# Allegro board AC_CON.brd
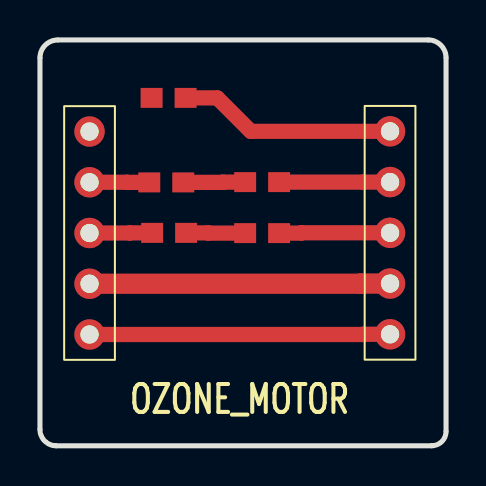
[diagram p0: board, top side]
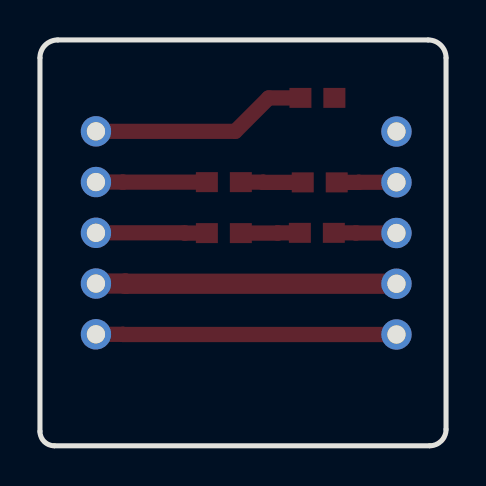
[diagram p1: board, bottom side, seen from below]

Outline 20.33 x 20.33 mm; copper layers: TOP, BOTTOM. Coordinates in mm from the lower left corner of the outline.
Outline path: 0,19.43 arc(0.26,20.07) 0.9,20.33 19.44,20.33 arc(20.07,20.07) 20.33,19.44 20.33,0.73 arc(20.12,0.22) 19.61,0.01 0.82,0.01 arc(0.24,0.25) 0,0.83 0,19.43 ; 0,19.56 arc(0.23,20.1) 0.77,20.32 19.56,20.32 arc(20.1,20.1) 20.32,19.56 20.32,0.76 arc(20.1,0.22) 19.56,0 0.77,0 arc(0.23,0.22) 0,0.76 0,19.56

## Placement (name value [footprint] x y rotation side)
J1  ACC2  [JUMPER5]  17.52 5.59 90 top
J2  ACC4  [JUMPER5]  2.48 5.58 90 top
R1  0R  [0603]  11.12 13.21 180 top
R2  0R  [0603]  11.12 10.66 180 top
R3  0R  [0603]  6.32 13.2 0 top
R4  0R  [0603]  6.47 10.67 0 top
R5  0R  [0603]  6.44 17.43 180 top

## Library data of the parts
J1 = CON5_0
J2 = CON5_1
R1-R5 = R

## Footprints (pads in the part's own frame, mm; a bottom-side part is the same pattern mirrored in y, then rotated)
0603
  rect 1.1x1 smd: 1(-0.85,0) 2(0.85,0)
JUMPER5
  round 1.524 hole 0.914: 1(0,0) 2(2.54,0) 3(5.08,0) 4(7.62,0) 5(10.16,0)

## Nets
3V3: J1.1 J2.1
GND: J1.2 J2.2
D1: R5.2
SCL: R1.2 R3.2
SDA: R2.2 R4.2
N64492: J2.4 R3.1
N64506: J2.3 R4.1
N64576: J1.3 R2.1
N64602: J1.4 R1.1
N64946: J1.5 R5.1

Pads without a net: J2 5

## Routing (per net, layer and track width the routed paths; a pad name or vN(x,y) marks a point on that pad's centre or on a via; arc(x,y) is an arc through that point)
3V3: length 15.1
  TOP w0.762: J1.1 16.18,5.59 16.18,5.58 J2.1
GND: length 15.1
  TOP w1.016: J2.2 16.05,8.12 16.05,8.13 J1.2
SCL: length 3.1
  TOP w0.762: R1.2 9.16,13.21 9.16,13.2 R3.2
SDA: length 3
  TOP w0.762: R2.2 8.43,10.66 8.43,10.67 R4.2
N64492: length 3
  TOP w0.762: R3.1 4.36,13.2 4.36,13.2 J2.4
N64506: length 3.1
  TOP w0.762: J2.3 4.51,10.66 4.51,10.67 R4.1
N64576: length 5.6
  TOP w0.762: R2.1 13.08,10.66 13.08,10.67 J1.3
N64602: length 5.6
  TOP w0.762: R1.1 16.18,13.21 16.18,13.21 J1.4
N64946: length 10.9
  TOP w0.762: J1.5 10.55,15.75 8.88,17.43 R5.1

## Text on the board
Ref Des/Silkscreen Top: OZONE_MOTOR
NCLEGEND-1-2: FIGURE | SIZE | 36.0 | DRILL CHART: TOP to BOTTOM | ALL UNITS ARE IN MILS | PLATED | QTY | 10
